# Altium PCB PWR_MOSFET.PcbDoc
Units mm, origin at the board's own origin, x right, y up, seen from the top; angles counter-clockwise.
Board outline 79.6 x 70.6 mm, 2 copper layers (Top Layer, Bottom Layer); 53 components, 31 nets, 154 pads, 22 vias.
Unrouted connection lines stored in the file: 37.
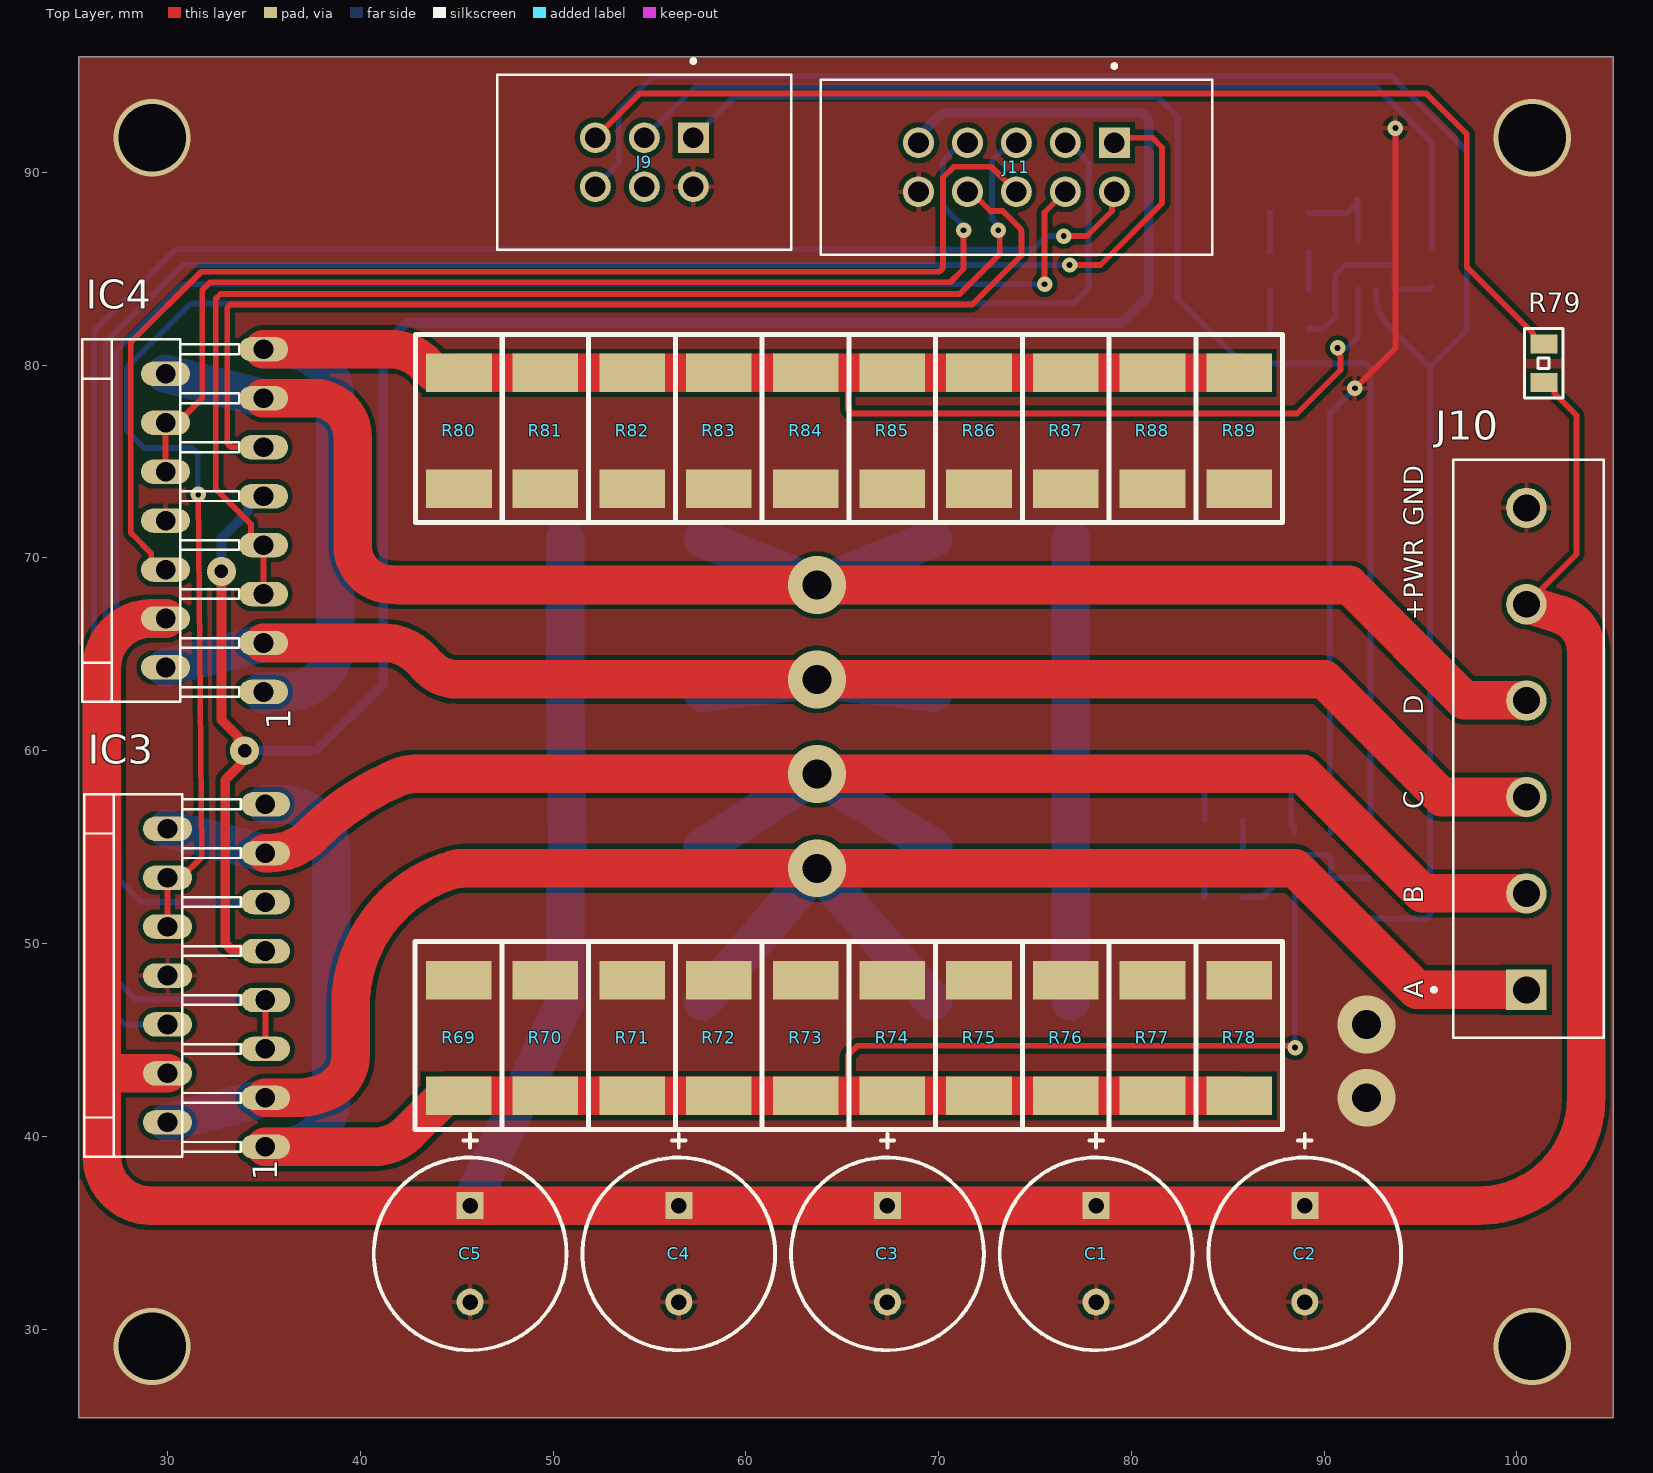
[diagram p0: Top Layer view]
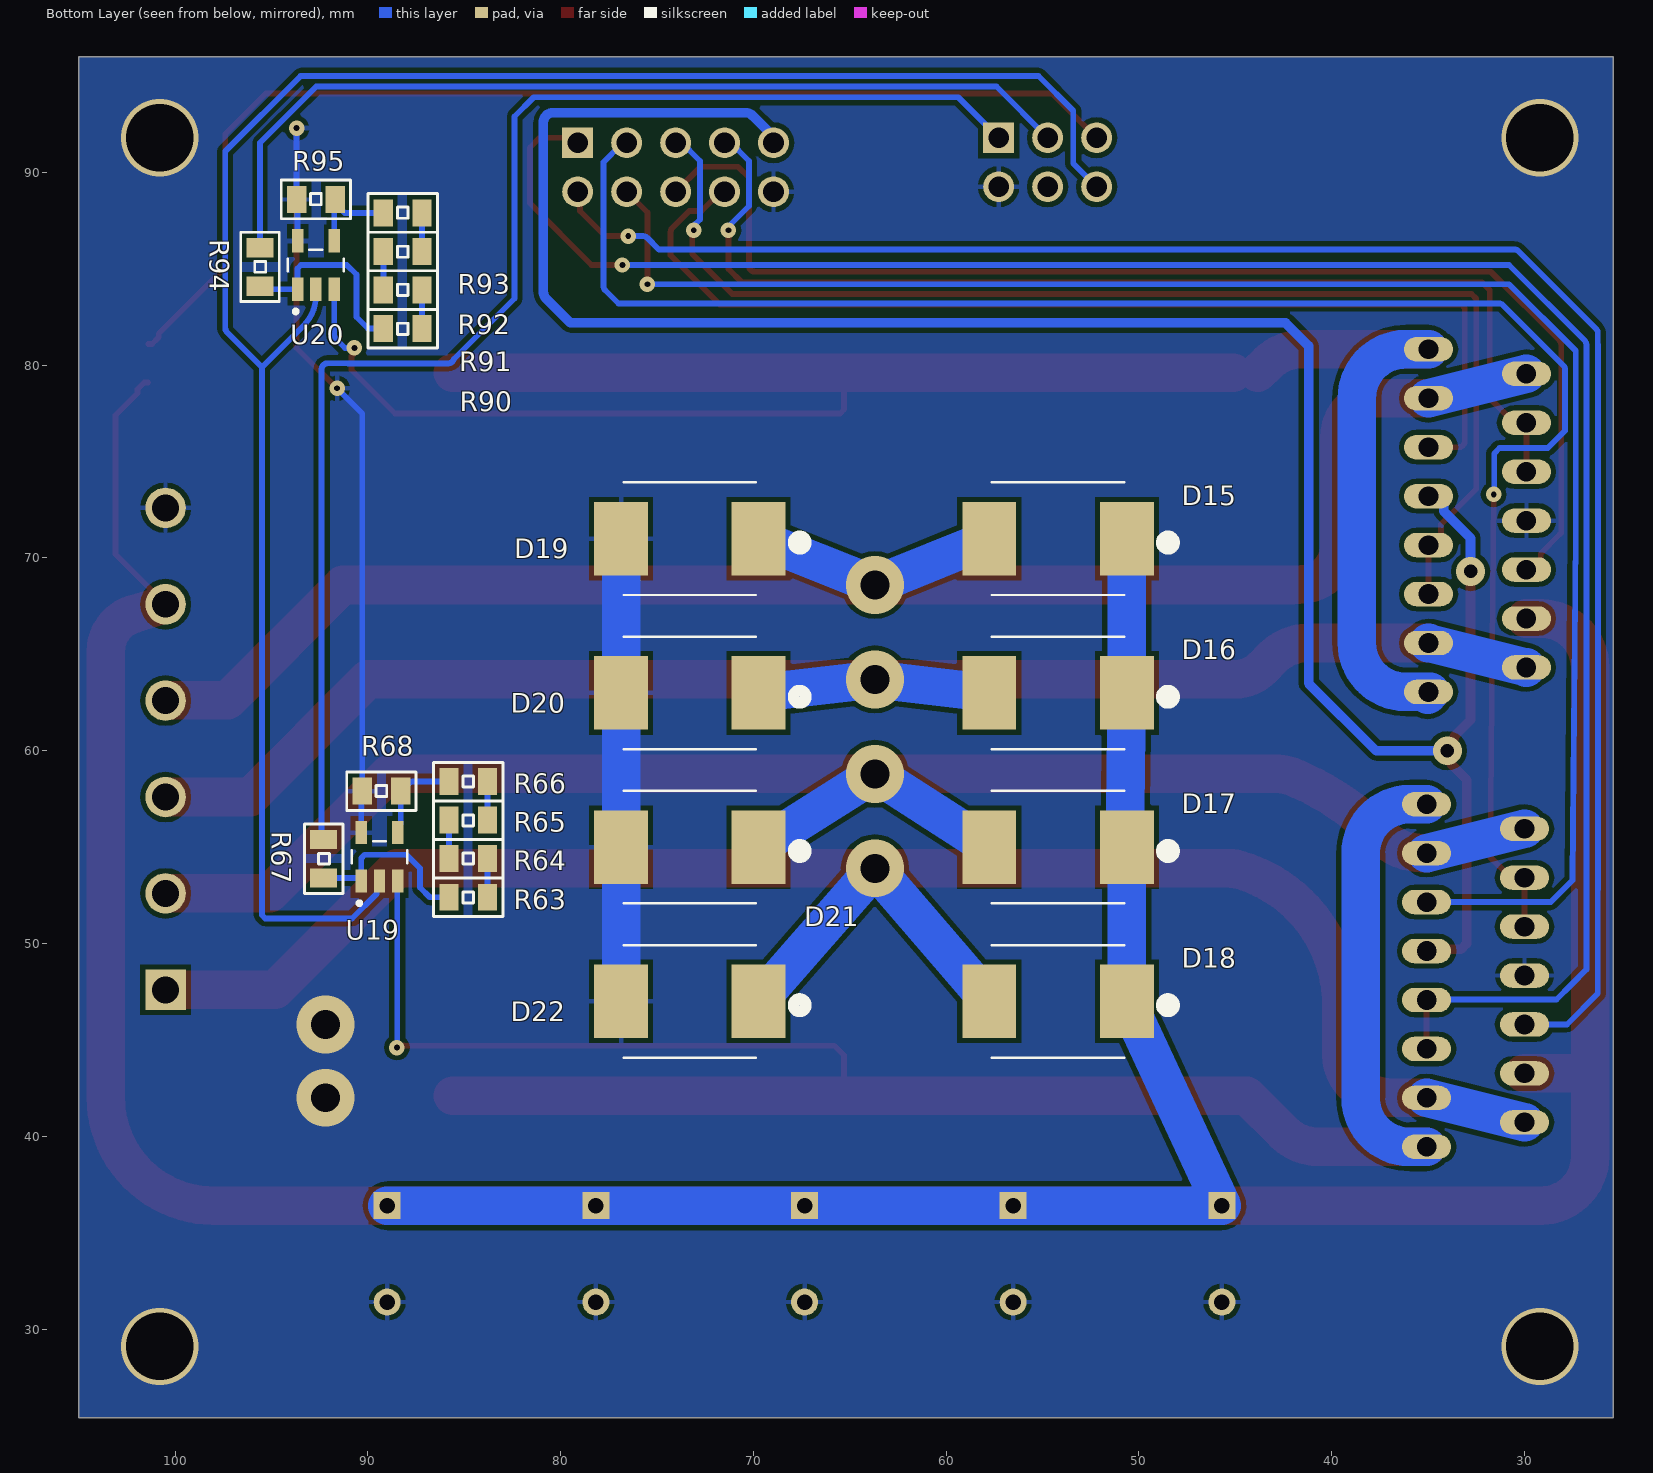
[diagram p1: Bottom Layer view, seen from below]
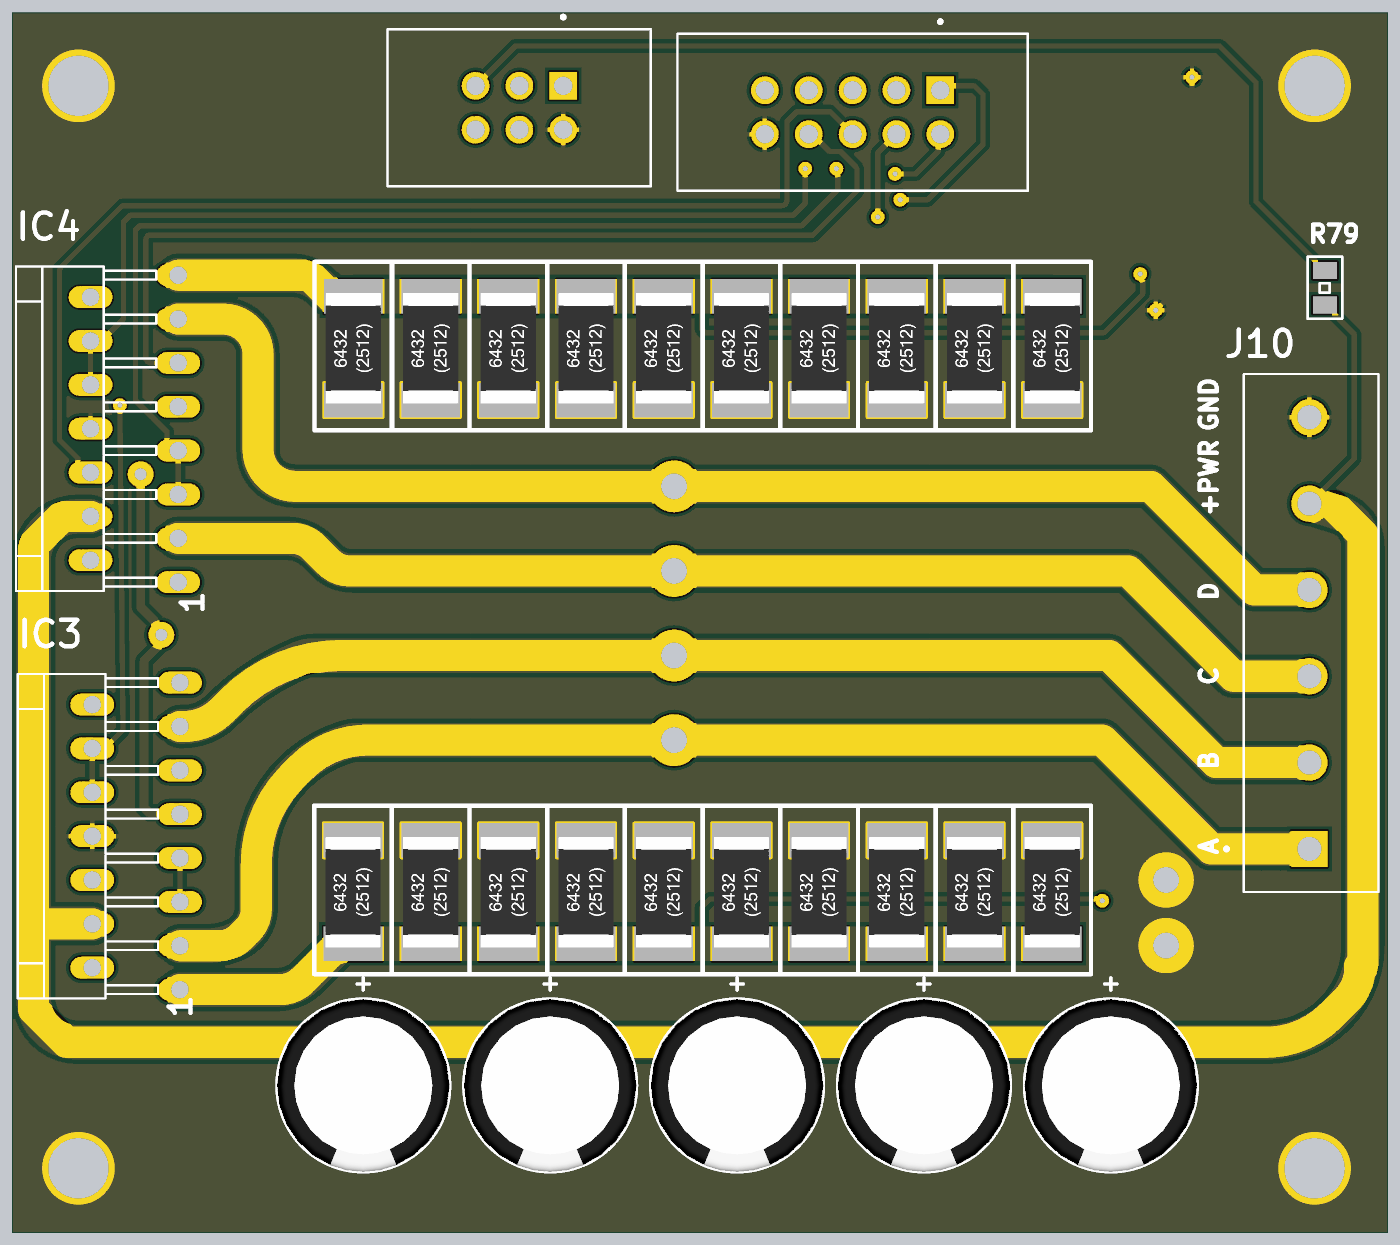
[diagram p2: 3D render of the assembled board from above, using the file's embedded part models]

## Layer stack, top to bottom
Top Solder: solder mask 0.0102, Solder Resist, Dk 3.5
Top Layer: signal copper 0.0356
Dielectric 1: dielectric 0.32, FR-4, Dk 4.8
Bottom Layer: signal copper 0.0356
Bottom Solder: solder mask 0.0102, Solder Resist, Dk 3.5

## Board outline
25.4,25.4 25.4,96 105,96 105,25.4

## Design rules (kind name [scope] priority, off if disabled: settings)
Clearance [All] p1: gap=0.254 ignorepadtopadclearanceinfootprint=FALSE except(0: Arc-Hole Track-Hole SMDPad-Hole THPad-Hole Via-Hole Fill-Hole Poly-Hole Region-Hole Text-Hole)
MinimumSolderMaskSliver [All] p1: minsoldermaskwidth=0
PolygonConnect [All] p1: connectstyle=Relief reliefconductorwidth=0.254 reliefentries=4 polygonreliefangle="90 Angle" airgapwidth=0.254
RoutingVias [All] p1: holewidth=0.711 width=1.27 viastyle="Through Hole" minholewidth=0.3 minwidth=0.7 maxholewidth=5 maxwidth=7
SilkToSolderMaskClearance [IsPad] p1: minsilkscreentomaskgap=0.1 clearancetoexposedcopper=TRUE
SolderMaskExpansion [All] p1: expansion=0.102 istentingtop=FALSE
Width [All] p1: maxlimit=5 minlimit=0.254 preferedwidth=0.254
28 further rules are at their usual default settings.

## Components (designator, comment, footprint, x,y, rotation, side; value= is the part's Value field where it differs from the comment)
C1 "220uF 50v" "ECR 10x13mm" 78.175,33.9 r270 top value=220uF
C2 "220uF 50v" "ECR 10x13mm" 89,33.9 r270 top value=220uF
C3 "220uF 50v" "ECR 10x13mm" 67.35,33.9 r270 top value=220uF
C4 "220uF 50v" "ECR 10x13mm" 56.525,33.9 r270 top value=220uF
C5 "220uF 50v" "ECR 10x13mm" 45.7,33.9 r270 top value=220uF
D15 "MBRS540T3G" DIOM7958X213N 54.2,71 r0 bottom
D16 "MBRS540T3G" DIOM7958X213N 54.2,63 r0 bottom
D17 "MBRS540T3G" DIOM7958X213N 54.2,55 r0 bottom
D18 "MBRS540T3G" DIOM7958X213N 54.2,47 r0 bottom
D19 "MBRS540T3G" DIOM7958X213N 73.3,71 r0 bottom
D20 "MBRS540T3G" DIOM7958X213N 73.3,63 r0 bottom
D21 "MBRS540T3G" DIOM7958X213N 73.3,55 r0 bottom
D22 "MBRS540T3G" DIOM7958X213N 73.3,47 r0 bottom
IC3 "L298" MW-15 30,48.34 r90 top
IC4 "L298" MW-15 29.9,71.94 r90 top
J9 "DS1013-06SSIB1" CONNFLY_DS1013-06SSIB1 54.74,90.5 r180 top
J10 "TB003-500-P06BE" CUI_TB003-500-P06BE 100.5,47.6 r90 top
J11 "DS1013-10SSIB1" CONNFLY_DS1013-10SSIB1 74.04,90.27 r180 top
R63 "10K" "Resistor 0805" 83.8,52.4 r0 bottom
R64 "10K" "Resistor 0805" 85.8,54.4 r180 bottom
R65 "10K" "Resistor 0805" 83.8,56.4 r0 bottom
R66 "10K" "Resistor 0805" 85.8,58.4 r180 bottom
R67 "10K" "Resistor 0805" 92.3,55.4 r270 bottom
R68 "10K" "Resistor 0805" 90.3,57.9 r180 bottom
R69 "1R" R2512 45.1,45.1 r90 top
R70 "1R" R2512 49.6,45.1 r90 top
R71 "1R" R2512 54.1,45.1 r90 top
R72 "1R" R2512 58.6,45.1 r90 top
R73 "1R" R2512 63.1,45.1 r90 top
R74 "1R" R2512 67.6,45.1 r90 top
R75 "1R" R2512 72.1,45.1 r90 top
R76 "1R" R2512 76.6,45.1 r90 top
R77 "1R" R2512 81.1,45.1 r90 top
R78 "1R" R2512 85.6,45.1 r90 top
R79 "20K" "Resistor 0805" 101.4,79.1 r90 top
R80 "1R" R2512 45.123,76.6 r90 top
R81 "1R" R2512 49.6,76.6 r90 top
R82 "1R" R2512 54.1,76.6 r90 top
R83 "1R" R2512 58.6,76.6 r90 top
R84 "1R" R2512 63.1,76.6 r90 top
R85 "1R" R2512 67.6,76.6 r90 top
R86 "1R" R2512 72.1,76.6 r90 top
R87 "1R" R2512 76.6,76.6 r90 top
R88 "1R" R2512 81.1,76.6 r90 top
R89 "1R" R2512 85.6,76.6 r90 top
R90 "10K" "Resistor 0805" 87.2,81.9 r0 bottom
R91 "10K" "Resistor 0805" 89.2,83.9 r180 bottom
R92 "10K" "Resistor 0805" 87.2,85.9 r0 bottom
R93 "10K" "Resistor 0805" 89.2,87.9 r180 bottom
R94 "10K" "Resistor 0805" 95.6,86.1 r270 bottom
R95 "10K" "Resistor 0805" 93.7,88.6 r180 bottom
U19 "LMC7101BIM5" *SOT95P280X145-5N 89.4,54.5 r90 bottom
U20 "LMC7101BIM5" *SOT95P280X145-5N 92.7,85.2 r90 bottom

## Footprints (in the part's own frame and the unit in brackets; to place one, negate y for a bottom-side part, rotate by r counter-clockwise, add the part's x,y. Pads: shape width x height; smd on the part's side, far side on the other; paste and mask are expansions set on the pad)
*SOT95P280X145-5N [mm]
  rect 1.21x0.59 smd: 1(-1.255,0.95) 2(-1.255,0) 3(-1.255,-0.95) 4(1.255,-0.95) 5(1.255,0.95)
  silkscreen extent -2.51,-1.45 0.8,1.45, body extent -1.18,-1.45 1.2,1.45, height 1.1
CONNFLY_DS1013-06SSIB1 [mm]
  rect 1.605x1.605 hole 1.07: 1(-2.54,-1.3)
  round 1.605 hole 1.07: 2(-2.54,1.24) 3(0,-1.3) 4(0,1.24) 5(2.54,-1.3) 6(2.54,1.24)
  silkscreen extent -7.61,-5.38 7.64,4.52
CONNFLY_DS1013-10SSIB1 [mm]
  rect 1.605x1.605 hole 1.07: 1(-5.08,-1.27)
  round 1.605 hole 1.07: 2(-5.08,1.27) 3(-2.54,-1.27) 4(-2.54,1.27) 5(0,-1.27) 6(0,1.27) 7(2.54,-1.27) 8(2.54,1.27) 9(5.08,-1.27) 10(5.08,1.27)
  silkscreen extent -10.15,-5.35 10.15,4.55
CUI_TB003-500-P06BE [mm]
  rect 2.1x2.1 hole 1.4: 1(0,0)
  round 2.1 hole 1.4: 2(5,0) 3(10,0) 4(15,0) 5(20,0) 6(25,0)
  silkscreen extent -2.5,-4 27.5,4.9
DIOM7958X213N [mil]
  rect 110x150 smd: A(140.49,0) C(-140.49,0)
  silkscreen extent -237,-115 135,115
"ECR 10x13mm" [mm] "Rad Capacitor 50В-220мкФ"
  rect 1.4x1.4 hole 0.8 mask+0.06: 1(-2.5,0)
  round 1.4 hole 0.8 mask+0.06: 2(2.5,0)
  silkscreen extent -6.22,-5 5,5, body extent -5,-5 4.97,5, height 12.51
MW-15 [mil]
  oval 50x100 hole 40: 1(-350,-200) 2(-300,0) 3(-250,-200) 4(-200,0) 5(-150,-200) 6(-100,0) 7(-50,-200) 8(0,0) 9(50,-200) 10(100,0) 11(150,-200) 12(200,0) 13(250,-200) 14(300,0) 15(350,-200)
  silkscreen extent -370,-150 370,170
R2512 [mm]
  rect 2x3.4 smd: 1(-3,0) 2(3,0)
  silkscreen extent -4.75,-2.25 5,2.25, body extent -3.2,-1.6 3.2,1.6, height 0.6
"Resistor 0805" [mm]
  rect 1x1.4 smd: 1(0,0) 2(2,0)
  silkscreen extent -0.8,-1 2.8,1, body extent -0.03,-0.65 2.02,0.65, height 0.41

## Part data
C1 C2 C3 C4 C5: library part "Cap Pol", "Polarized Capacitor (Rad)", Voltage=50, Type=Type, URL=http://www.hitano.com.tw/PDF/ECR_081225.pdf
D15 D16 D17 D18 D19 D20 D21 D22: "Diode Schottky 40V 5A Surface Mount SMC", Package="DO-214 ON Semiconductor", Availability=Unavailable, MF="ON Semiconductor", MP=MBRS540T3G, Price=None, SnapEDA_Link=https://www.snapeda.com/parts/MBRS540T3G/ON%20Semiconductor/view-part/78777/?ref=snap
IC3 IC4: library part L298N, "Dual Full-Bridge Driver"
J9: "Socket; IDC; male; PIN: 6; straight; THT; gold plated; 2.54mm"
J10: "2~24 Poles, Screw Type, Horizontal, 5.0 Pitch, 26~14 _AWG_, Terminal Block Connector", Package=None, Availability=Unavailable, MF="CUI Devices", MP=TB003-500-P06BE, Price=None, SnapEDA_Link=https://www.snapeda.com/parts/TB003-500-P06BE/CUI%20Devices/view-part/3590657/?ref=snap
J11: "Socket; IDC; male; PIN: 10; straight; THT; gold plated; 2.54mm", Package=None, Availability=Unavailable, BuyPart=https://www.snapeda.com/parts/DS1013-10SSIB1/Connfly/view-part/951223/?ref=eda, MF=Connfly, MP=DS1013-10SSIB1, Price=None, SnapEDA_Link=https://www.snapeda.com/parts/DS1013-10SSIB1/Connfly/view-part/951223/?ref=snap
R63 R64 R65 R66 R67 R68 R79 R90 R91 R92 R93 R94 R95: library part Resistor
R69 R70 R71 R72 R73 R74 R75 R76 R77 R78 R80 R81 R82 R83 R84 R85 R86 R87 R88 R89: library part "Resistor - 1%", "Resistor - 1%"
U19 U20: Check_prices=https://www.snapeda.com/parts/LMC7101BIM5/Texas%20Instruments/view-part/19255/?ref=eda, SnapEDA_Link=https://www.snapeda.com/parts/LMC7101BIM5/Texas%20Instruments/view-part/19255/?ref=snap

## Via types
v1: diameter 0.8, hole 0.3, Top Layer to Bottom Layer, 10 vias
v2: diameter 3, hole 1.5, Top Layer to Bottom Layer, 6 vias
v3: diameter 4, hole 3.5, Top Layer to Bottom Layer, 4 vias
v4: diameter 1.5, hole 0.7, Top Layer to Bottom Layer, 2 vias

## Nets (pads, with @x,y where several pads share a name; then routed paths per layer and width w, separated by ;. In a path a pad name is that pad's centre, name@x,y a point inside that pad or via, vN(x,y) a via of type N, cw(c..) or ccw(c..) an arc to the next point about the centre after c; other vN are vias at no path point)
+5v: IC3.9 IC4.9 J11.9 | length 116.5
  Top Layer w0.5: v4(32.8,69.3) 32.8,61.6 33.639,60.761 33.639,60.631 34,60.271 33.809,60.079 33.809,59.309 33,58.5 33,49.993 33.293,49.7 34.99,49.7 IC3.9
  Bottom Layer w0.5: v4(32.8,69.3) 32.8,71.03 34.198,72.428 34.198,72.854 34.553,73.21 IC4.9 ; v4(34,60) 37.7,60 41.2,63.5 41.2,81 42.4,82.2 79.5,82.2 80.754,83.454 ccw(c80.4,83.807) 80.9,83.809 80.9,92.6 ccw(c80.4,92.6) 80.4,93.1 70.407,93.1 ccw(c70.407,92.6) 70.054,92.954 68.96,91.86 J11.9
A: IC3.5 IC3.7 J11.1 | length 107.5
  Top Layer w0.3: IC3.5 IC3.7 ; v1(76.8,85.2) 78.4,85.2 81.6,88.4 81.6,91.3 81.1,91.8 79.417,91.8 ccw(c79.417,91.5) J11.1
  Bottom Layer w0.3: IC3.7 34.978,47.07 34.948,47.1 29.469,47.1 29.467,47.1 28.343,47.1 27.554,47.889 26.792,48.651 26.792,81.068 cw(c27.092,81.068) 26.88,81.28 30.8,85.2 v1(76.8,85.2)
A3.3v: J9.6 U19.2 U20.2 | length 103.6
  Bottom Layer w0.3: J9.6 53.406,90.466 53.406,93.207 55.208,95.008 93.492,95.008 97.4,91.1 97.4,81.924 cw(c97.1,81.924) 97.312,81.712 95.5,79.9 ; U19.2 89.545,53.1 89.545,52.579 90.824,51.3 95.324,51.3 95.5,51.476 95.5,79.9 ; U20.2 92.7,83.6 ccw(c94.873,83.6) 93.336,82.064 95.5,79.9
AGND: C1.2 C2.2 C3.2 C4.2 C5.2 D19.A D20.A D21.A D22.A IC3.8 IC4.8 J9.2 J10.6 J11.10 R68.1 R69.2 R70.2 R71.2 R72.2 R73.2 R74.2 R75.2 R76.2 R77.2 R78.2 R80.1 R81.1 R82.1 R83.1 R84.1 R85.1 R86.1 R87.1 R88.1 R89.1 R95.1 U19.5 U20.5 | length 67.8
  Top Layer w0.3: v1(91.6,78.8) 93.7,80.9 v1(93.7,92.3)
  Bottom Layer w0.3: U19.5 90.35,57.85 R68.1 90.3,77.5 v1(91.6,78.8) ; U20.5 93.65,88.55 R95.1 v1(93.7,92.3)
  Bottom Layer w2: D22.A 76.868,54.897 76.869,54.9 D20.A D19.A
  other v2: 92.2,42 92.2,45.8
  other v3: 29.2,29.1 100.8,29.1 29.2,91.8 100.8,91.8
B: IC3.10 IC3.12 J11.3 | length 92.9
  Top Layer w0.3: IC3.10 IC3.12 30.72,53.42 31.779,54.479 31.777,54.605 v1(31.6,73.3)
  Bottom Layer w0.3: v1@31.574,73.3 31.574,75.426 31.3,75.7 28.8,75.7 27.9,76.6 27.9,79.776 cw(c28.2,79.776) 27.988,79.988 31.112,83.112 cw(c31.324,82.9) 31.324,83.2 77,83.2 77.698,83.898 ccw(c77.486,84.111) 77.787,84.111 77.786,90.533 76.868,91.452 ccw(c76.656,91.24) 76.656,91.54 J11.3
C: IC4.5 IC4.7 J11.5 | length 64.5
  Top Layer w0.3: IC4.5 IC4.7 34.779,70.67 34.331,71.118 34.331,71.755 32.5,73.586 32.5,83.449 32.749,83.698 71.098,83.698 73.177,85.777 73.177,86.923 v1(73.1,87)
  Bottom Layer w0.3: v1(73.1,87) 73.1,87.235 72.773,87.562 72.773,90.593 J11.5@73.8,91.62
D: IC4.10 IC4.12 J11.7 | length 58
  Top Layer w0.3: IC4.10 IC4.12 30.535,77.02 31.8,78.285 31.8,83.9 32.2,84.3 70.605,84.3 71.3,84.995 v1(71.3,87)
  Bottom Layer w0.3: J11.7@71.26,91.62 70.233,90.593 70.233,88.267 71.3,87.2 v1(71.3,87)
EN_B: IC3.11 J11.4 | length 90.3
  Top Layer w0.3: v1(75.5,84.2) 75.5,87.92 J11.4
  Bottom Layer w0.3: IC3.11 30.5,52.15 28.644,52.15 27.508,53.286 27.346,71.146 27.346,80.746 30.8,84.2 v1(75.5,84.2)
EN_D: IC4.11 J11.8 | length 56.2
  Top Layer w0.3: IC4.11 33.4,75.75 cw(c33.4,76.05) 33.1,76.05 33.1,82.876 cw(c33.4,82.876) 33.188,83.088 33.244,83.144 71.744,83.144 74.3,85.7 74.3,86.913 ccw(c74,86.913) 74.212,87.125 73.333,88.004 72.696,88.004 71.788,88.912 ccw(c71.576,88.7) 71.576,89 J11.8
INH1(EN_A): IC3.6 J11.2 | length 95.2
  Top Layer w0.3: v1(76.5,86.7) 77.7,86.7 79,88 79,88.76 cw(c79.3,88.76) J11.2
  Bottom Layer w0.3: 26.195,53.478 26.195,52.8 26.2,52.795 26.2,47.4 27.8,45.8 IC3.6 ; 26.195,53.478 26.194,80.595 cw(c27.602,80.595) 26.194,80.601 26.2,81.677 cw(c26.5,81.675) 26.287,81.887 30.32,85.92 cw(c30.532,85.708) 30.532,86.008 74.908,86.008 75.512,86.612 cw(c75.724,86.4) 75.724,86.7 v1(76.5,86.7)
INH2(EN_C): IC4.6 J11.6 | length 65.7
  Top Layer w0.3: IC4.6 29.61,69.4 29.162,69.848 29.162,70.238 28.188,71.212 28.1,71.3 28.1,81.076 cw(c28.4,81.076) 28.188,81.288 31.754,84.854 69.933,84.854 ccw(c69.933,85.154) 70.233,85.154 70.233,89.733 70.8,90.3 72.74,90.3 J11.6
NetD15_A: D15.A D19.C IC4.13 IC4.14 J10.4 | length 94.1
  Top Layer w2: IC4.13 37.6,78.29 cw(c37.6,76.29) 39.6,76.29 39.6,70.639 ccw(c41.6,70.639) 41.242,68.671 ccw(c42.038,73.083) 42.038,68.6 v2(63.7,68.6) 91.3,68.6 97.281,62.619 100.481,62.619 J10.4
  Bottom Layer w2: IC4.14 IC4.13 ; D15.A v2(63.7,68.6) D19.C
NetD16_A: D16.A D20.C IC4.2 IC4.3 J10.3 | length 85.9
  Top Layer w2: IC4.3 41.258,65.59 cw(c41.258,63.05) 43.054,64.846 43.614,64.286 43.616,64.284 ccw(c45.028,65.7) 45.028,63.7 v2(63.7,63.7) 90,63.7 96.1,57.6 J10.3
  Bottom Layer w2: IC4.2 IC4.3 ; D16.A v2(63.7,63.7) D20.C
NetD17_A: D17.A D21.C IC3.13 IC3.14 J10.2 | length 88.6
  Top Layer w2: IC3.13 35.281,54.69 35.286,54.69 ccw(c35.286,57.778) 37.465,55.59 37.473,55.598 cw(c47.449,45.612) 42.028,58.645 cw(c42.8,56.8) 42.796,58.8 v2(63.7,58.8) 88.9,58.8 95.1,52.6 J10.2
  Bottom Layer w2: IC3.14 IC3.13 ; D17.A v2(63.7,58.8) D21.C
NetD18_A: D18.A D22.C IC3.2 IC3.3 J10.1 | length 99.5
  Top Layer w2: IC3.3 36.638,41.99 ccw(c36.638,46.038) 38.342,42.366 ccw(c37.5,44.18) 39.5,44.182 39.5,46.781 39.5,46.785 cw(c46.821,46.785) 44.804,53.823 cw(c45.353,51.9) 45.353,53.9 v2(63.7,53.9) 88.5,53.9 94.8,47.6 J10.1
  Bottom Layer w2: IC3.2 IC3.3 ; D18.A v2(63.7,53.9) D22.C
NetIC3_1: IC3.1 IC3.15 R69.1 R70.1 R71.1 R72.1 R73.1 R74.1 R75.1 R76.1 R77.1 R78.1 U19.3 | length 108.2
  Top Layer w0.3: 65.3,42.1 65.3,44.2 65.8,44.7 88.1,44.7 88.126,44.726 88.156,44.696 88.404,44.696 v1(88.5,44.6)
  Top Layer w2: IC3.1 40.698,39.45 ccw(c40.698,41.99) 42.494,40.194 44.4,42.1 R69.1 R70.1 R71.1 R72.1 R73.1 65.3,42.1 R74.1 R75.1 R76.1 R77.1 R78.1
  Bottom Layer w0.3: U19.3 88.475,53.22 88.475,44.625 v1(88.5,44.6)
  Bottom Layer w2: IC3.1 35.96,39.45 ccw(c35.96,41.99) 38.5,41.99 38.5,54.69 ccw(c35.96,54.69) 35.96,57.23 IC3.15
NetIC4_1: IC4.1 IC4.15 R80.2 R81.2 R82.2 R83.2 R84.2 R85.2 R86.2 R87.2 R88.2 R89.2 U20.3 | length 106.5
  Top Layer w0.3: 65.3,79.6 65.3,77.7 65.5,77.5 88.6,77.5 90.85,79.75 90.85,80.434 cw(c91.15,80.434) 90.852,80.467 90.7,80.619 v1(90.7,80.9)
  Top Layer w2: IC4.15 41.555,80.83 cw(c41.555,78.29) 43.351,80.086 R80.2@43.837,79.6 ; R80.2 R81.2 R82.2 R83.2 R84.2 65.3,79.6 R85.2 R86.2 R87.2 R88.2 R89.2
  Bottom Layer w0.3: v1(90.7,80.9) 91.186,80.9 91.602,81.315 ccw(c91.45,81.574) 91.75,81.574 U20.3
  Bottom Layer w2: IC4.15 36.16,80.83 cw(c36.16,78.29) 38.7,78.29 38.7,65.59 cw(c36.16,65.59) 36.16,63.05 34.88,63.05 IC4.1@35.03,62.9
NetJ9_5: J9.5 R79.2 | length 59.7
  Top Layer w0.3: J9.5 54.5,94.1 95.3,94.1 97.4,92 97.4,85.1 100.85,81.65 100.85,81.45 101.2,81.1 R79.2
NetR63_1: R63.1 R64.2 | length 2
  Bottom Layer w0.3: R63.1 R64.2
NetR63_2: R63.2 R67.2 U19.1 | length 9.1
  Bottom Layer w0.3: R63.2 86.8,52.4 87.3,52.9 87.3,53.9 88,54.6 90.174,54.6 90.35,54.424 U19.1 ; U19.1@90.495,53.4 R67.2
NetR64_1: R64.1 R65.2 | length 2
  Bottom Layer w0.3: R64.1 R65.2
NetR65_1: R65.1 R66.2 | length 2
  Bottom Layer w0.3: R65.1 R66.2
NetR66_1: R66.1 R68.2 U19.4 | length 4.9
  Bottom Layer w0.3: R66.1 87.676,58.4 cw(c87.676,58.1) 87.889,58.311 R68.2 88.3,56.215 88.45,56.065 U19.4
NetR90_1: R90.1 R91.2 | length 2
  Bottom Layer w0.3: R90.1 R91.2
NetR90_2: R90.2 R94.2 U20.1 | length 10.3
  Bottom Layer w0.3: R90.2 90,81.9 90.6,82.5 90.6,84.7 91.1,85.2 93.474,85.2 93.65,85.024 U20.1 95.445,83.945 R94.2
NetR91_1: R91.1 R92.2 | length 2
  Bottom Layer w0.3: R91.1 R92.2
NetR92_1: R92.1 R93.2 | length 2
  Bottom Layer w0.3: R92.1 R93.2
NetR93_1: R93.1 R95.2 U20.4 | length 5.1
  Bottom Layer w0.3: R93.1 91.2,87.9 91.7,88.4 R95.2 91.75,88.55 U20.4
sensI_1: J9.1 R67.1 | length 71.9
  Bottom Layer w0.3: J9.1 59.38,93.9 81.4,93.9 82.4,92.9 82.4,83.458 85.54,80.318 ccw(c85.829,80.396) 85.829,80.096 91.033,80.096 91.037,80.1 92.104,80.1 cw(c92.104,79.8) 92.404,79.8 92.404,55.628 cw(c92.104,55.628) 92.316,55.416 R67.1
sensI_2: J9.3 R94.1 | length 48.6
  Bottom Layer w0.3: J9.3 57.394,94.454 92.683,94.454 95.6,91.537 R94.1
Vpwr: C1.1 C2.1 C3.1 C4.1 C5.1 D15.C D16.C D17.C D18.C IC3.4 IC4.4 J10.5 R79.1 | length 235.2
  Top Layer w0.3: J10.5 103.1,70.2 103.1,77.4 101.95,78.55 101.95,78.75 101.6,79.1 R79.1
  Top Layer w2: IC4.4 29.14,66.86 ccw(c29.14,64.32) 26.6,64.32 26.6,43.5 ; IC3.4 26.84,43.26 cw(c26.84,43.5) 26.6,43.5 ; J10.5 102.186,67.08 cw(c101.6,65.168) 103.6,65.168 103.6,42 cw(c98,42) 98,36.4 C2.1 C1.1 C3.1 C4.1 C5.1 29.14,36.4 cw(c29.14,38.94) 26.6,38.94 26.6,43.5
  Bottom Layer w2: D15.C D16.C ccw(c52.632,63) 50.632,62.975 50.732,55 ccw(c52.632,54.375) 50.631,54.375 D18.C C5.1 C4.1 C3.1 C1.1 C2.1
pads on no net: J9.4

## Polygon pours and split planes (outlines as drawn)
AGND on Top Layer "GND" (solid, remove dead copper, pour order 1): 25.4,96 105,96 105,25.4 25.4,25.4
AGND on Bottom Layer "GND" (solid, remove dead copper, pour order 0): 25.4,96 105,96 105,25.4 25.4,25.4

## Silkscreen, mask and mechanical layers (free items; w line width, h text height)
Top Overlay:
  text "GND" at 95.146,71.654 h1 r90
  text "+PWR" at 95.146,66.754 h1 r90
  text "D" at 95.146,61.854 h1 r90
  text "C" at 95.146,56.954 h1 r90
  text "B" at 95.146,52.054 h1 r90
  text "A" at 95.146,47.154 h1 r90
Top Solder:
  lines w1.8: 26.7,43.3 ccw(c26.797,43.397) 26.797,43.26 30,43.26 ; 29.9,66.86 28.26,66.86 26.6,65.2 26.6,38.3 28.5,36.4 97.991,36.4 ccw(c97.991,41.733) 101.762,37.962 102.672,38.872 ccw(c100.86,40.685) 103.423,40.685 ; 34.98,65.59 41.592,65.59 cw(c41.592,63.855) 42.818,65.082 43.705,64.195 ccw(c44.9,65.39) 44.9,63.7 45.3,63.7 ; 34.98,78.29 37.582,78.29 cw(c37.582,76.272) 39.6,76.272 39.6,70.749 ccw(c41.749,70.749) 41.749,68.6 87.2,68.6 91.3,68.6 97.3,62.6 100.5,62.6 ; 34.98,80.83 42.57,80.83 43.8,79.6 ; 35.08,39.45 40.872,39.45 ccw(c40.872,41.328) 42.2,40 43.859,41.659 cw(c44.2,41.317) 44.2,41.8 ; 35.08,41.99 37.39,41.99 ccw(c37.39,43.68) 38.585,42.485 39.005,42.905 ccw(c37.81,44.1) 39.5,44.1 39.5,46.73 cw(c46.67,46.73) 41.6,51.8 42.137,52.337 cw(c45.91,48.564) 45.91,53.9 88.5,53.9 94.8,47.6 100.5,47.6 ; 35.08,54.69 35.32,54.69 ccw(c35.32,57.756) 37.488,55.588 38.081,56.181 cw(c44.404,49.858) 44.404,58.8 88.9,58.8 95.1,52.6 100.5,52.6 ; 100.5,57.6 96.1,57.6 90,63.7 45.3,63.7 ; 101.9,67.5 103.6,65.8 103.6,44.4 ; 103.4,40.8 ccw(c102.917,41.283) 103.6,41.283 ; 103.6,40.785 103.6,44.7 ; 45.3,63.7 ccw(c45.3,63.7) 45.3,63.7
Bottom Solder:
  lines w1.8: 29.9,64.32 34.98,65.59 ; 29.9,79.56 34.98,78.29 ; 30,40.72 35.08,41.99 ; 30,55.96 35.08,54.69 ; 34.88,39.45 36.025,39.45 ccw(c36.025,41.925) 38.5,41.925 38.5,54.622 ccw(c35.892,54.622) 35.892,57.23 35.08,57.23 ; 34.98,63.05 36.225,63.05 ccw(c36.225,65.525) 38.7,65.525 38.7,78.219 ccw(c36.089,78.219) 36.089,80.83 34.98,80.83
Board:
  the board outline again, w0.1

## Text inside footprints (layer, text, board x,y; h text height)
IC3: Top Overlay "1" at 35.7,37.7 h1.27 r90
IC4: Top Overlay "1" at 36.4,61.1 h1.27 r90